# EAGLE board MyEasyPort (EAGLE 6.4)

Size 100 x 80 mm. Coordinates in mm from the lower left corner, seen from the top.
Outline: 0,0 100,0 100,80 0,80 0,0
Copper layers (1*16): Top 0.035mm / dielectric 1.5mm / Bottom 0.035mm
Design rules "default": minimum track width 10mil, minimum drill 24mil, track to track 8mil, track to pad 8mil, pad to pad 8mil, via to via 8mil, smd to smd 8mil, copper to edge 40mil, drill to drill 8mil, minimum pad ring 10mil, minimum via ring 8mil, stop-mask expansion 4mil, vias tented up to drill 0mil, thermal gap 10mil

## Footprints (pad centres in the part's own frame; a part is rotated, then mirrored left to right if it is on the bottom)
2X25 = drill 1.016 octagon: 1 -30.48,-1.27; 2 -30.48,1.27; 3 -27.94,-1.27; 4 -27.94,1.27; 5 -25.4,-1.27; 6 -25.4,1.27; 7 -22.86,-1.27; 8 -22.86,1.27; 9 -20.32,-1.27; 10 -20.32,1.27; 11 -17.78,-1.27; 12 -17.78,1.27; 13 -15.24,-1.27; 14 -15.24,1.27; 15 -12.7,-1.27; 16 -12.7,1.27; 17 -10.16,-1.27; 18 -10.16,1.27; 19 -7.62,-1.27; 20 -7.62,1.27; 21 -5.08,-1.27; 22 -5.08,1.27; 23 -2.54,-1.27; 24 -2.54,1.27; 25 0,-1.27; 26 0,1.27; 27 2.54,-1.27; 28 2.54,1.27; 29 5.08,-1.27; 30 5.08,1.27; 31 7.62,-1.27; 32 7.62,1.27; 33 10.16,-1.27; 34 10.16,1.27; 35 12.7,-1.27; 36 12.7,1.27; 37 15.24,-1.27; 38 15.24,1.27; 39 17.78,-1.27; 40 17.78,1.27; 41 20.32,-1.27; 42 20.32,1.27; 43 22.86,-1.27; 44 22.86,1.27; 45 25.4,-1.27; 46 25.4,1.27; 47 27.94,-1.27; 48 27.94,1.27; 49 30.48,-1.27; 50 30.48,1.27
2X10 = drill 1.016 octagon: 1 -11.43,-1.27; 2 -11.43,1.27; 3 -8.89,-1.27; 4 -8.89,1.27; 5 -6.35,-1.27; 6 -6.35,1.27; 7 -3.81,-1.27; 8 -3.81,1.27; 9 -1.27,-1.27; 10 -1.27,1.27; 11 1.27,-1.27; 12 1.27,1.27; 13 3.81,-1.27; 14 3.81,1.27; 15 6.35,-1.27; 16 6.35,1.27; 17 8.89,-1.27; 18 8.89,1.27; 19 11.43,-1.27; 20 11.43,1.27
SO16 = smd 0.66 x 2.032: 1 -4.445,-3.073; 2 -3.175,-3.073; 3 -1.905,-3.073; 4 -0.635,-3.073; 5 0.635,-3.073; 6 1.905,-3.073; 7 3.175,-3.073; 8 4.445,-3.073; 9 4.445,3.073; 10 3.175,3.073; 11 1.905,3.073; 12 0.635,3.073; 13 -0.635,3.073; 14 -1.905,3.073; 15 -3.175,3.073; 16 -4.445,3.073

## Placement (x,y rotation side)
JP1  [2X25]  63.5,40.64 0 top
JP2  [2X10]  33.02,8.89 180 top
JP3  [2X10]  63.5,69.85 0 top
U$1  SI8442IS1  [SO16]  36.83,29.21 180 top
U$2  SI8442IS1  [SO16]  57.15,29.21 180 top
U$3  SI8442IS1  [SO16]  76.2,29.21 180 top
U$4  SI8442IS1  [SO16]  91.44,29.21 180 top
U$5  SI8442IS1  [SO16]  92.71,49.53 0 top
U$6  SI8442IS1  [SO16]  76.2,49.53 0 top
U$7  SI8442IS1  [SO16]  57.15,49.53 0 top
U$8  SI8442IS1  [SO16]  36.83,49.53 0 top

## Library data of the parts
JP1-JP3 = pinhead
U$1-U$8 = silicon-labs

## Nets
3.3V+: JP3.20 U$1.10 U$1.16 U$2.10 U$2.16 U$3.10 U$3.16 U$4.10 U$4.16 U$5.10 U$5.16 U$6.10 U$6.16 U$7.10 U$7.16 U$8.10 U$8.16
5V+: JP1.49 U$1.1 U$1.7 U$2.1 U$2.7 U$3.1 U$4.1 U$4.7 U$5.1 U$5.7 U$6.1 U$6.7 U$7.1 U$7.7 U$8.1 U$8.7
C0-0: JP1.1 U$1.6
C0-1: JP1.6 U$8.5
C0-2: JP1.3 U$1.5
C0-3: JP1.8 U$8.6
C0-4: JP1.17 U$2.6
C0-5: JP1.22 U$7.5
C0-6: JP1.19 U$2.5
C0-7: JP1.24 U$7.6
C1-0: JP1.2 U$8.3
C1-1: JP1.5 U$1.4
C1-2: JP1.4 U$8.4
C1-3: JP1.7 U$1.3
C1-4: JP1.18 U$7.3
C1-5: JP1.21 U$2.4
C1-6: JP1.20 U$7.4
C1-7: JP1.23 U$2.3
C2-0: JP1.33 U$3.6
C2-1: JP1.38 U$6.5
C2-2: JP1.35 U$3.5
C2-3: JP1.40 U$6.6
C2-4: JP1.41 U$4.6
C2-5: JP1.46 U$5.5
C2-6: JP1.43 U$4.5
C2-7: JP1.48 U$5.6
C3-0: JP1.34 U$6.3
C3-1: JP1.37 U$3.4
C3-2: JP1.36 U$6.4
C3-3: JP1.39 U$3.3
C3-4: JP1.42 U$5.3
C3-5: JP1.45 U$4.4
C3-6: JP1.44 U$5.4
C3-7: JP1.47 U$4.3
GND1: JP1.50 U$1.8 U$2.8 U$3.8 U$4.8 U$5.8 U$6.8 U$7.8 U$8.8
GND1A: U$8.2
GND2: JP3.17 U$1.9 U$2.9 U$3.9 U$4.9 U$5.9 U$6.9 U$7.9 U$8.9
PA2: JP2.1 U$3.12
PA3: JP2.3 U$3.11
PA4: JP2.5 U$2.12
PA5: JP3.6 U$6.14
PA6: JP3.4 U$5.13
PA7: JP3.2 U$5.14
PB0: JP3.16 U$8.13
PB1: JP3.14 U$8.14
PB2: JP2.17 U$1.11
PB3: JP2.16 U$2.13
PB4: JP3.8 U$6.13
PB6: JP2.7 U$2.11
PB7: JP2.9 U$1.12
PC4: JP2.14 U$2.14
PC5: JP2.12 U$3.13
PC6: JP2.10 U$3.14
PC7: JP2.8 U$4.14
PD0: JP3.15 U$8.11
PD1: JP3.13 U$8.12
PD2: JP3.11 U$7.11
PD3: JP3.9 U$7.12
PD6: JP2.6 U$4.13
PD7: JP2.4 U$4.12
PE1: JP3.7 U$6.11
PE2: JP3.5 U$6.12
PE3: JP3.3 U$5.11
PE4: JP3.12 U$7.13
PE5: JP3.10 U$7.14
PF1: JP3.1 U$5.12
PF2: JP2.20 U$1.13
PF3: JP2.18 U$1.14
PF4: JP2.2 U$4.11

## Tracks (layer width: path | path; a pad name or v marks a point on that pad's centre or on a via)
3.3V+  (16 unrouted)
5V+  (15 unrouted)
C0-0  (1 unrouted)
C0-1  (1 unrouted)
C0-2  (1 unrouted)
C0-3  (1 unrouted)
C0-4  (1 unrouted)
C0-5  (1 unrouted)
C0-6  (1 unrouted)
C0-7  (1 unrouted)
C1-0  (1 unrouted)
C1-1  (1 unrouted)
C1-2  (1 unrouted)
C1-3  (1 unrouted)
C1-4  (1 unrouted)
C1-5  (1 unrouted)
C1-6  (1 unrouted)
C1-7  (1 unrouted)
C2-0  (1 unrouted)
C2-1  (1 unrouted)
C2-2  (1 unrouted)
C2-3  (1 unrouted)
C2-4  (1 unrouted)
C2-5  (1 unrouted)
C2-6  (1 unrouted)
C2-7  (1 unrouted)
C3-0  (1 unrouted)
C3-1  (1 unrouted)
C3-2  (1 unrouted)
C3-3  (1 unrouted)
C3-4  (1 unrouted)
C3-5  (1 unrouted)
C3-6  (1 unrouted)
C3-7  (1 unrouted)
GND1  (8 unrouted)
GND2  (8 unrouted)
PA2  (1 unrouted)
PA3  (1 unrouted)
PA4  (1 unrouted)
PA5  (1 unrouted)
PA6  (1 unrouted)
PA7  (1 unrouted)
PB0  (1 unrouted)
PB1  (1 unrouted)
PB2  (1 unrouted)
PB3  (1 unrouted)
PB4  (1 unrouted)
PB6  (1 unrouted)
PB7  (1 unrouted)
PC4  (1 unrouted)
PC5  (1 unrouted)
PC6  (1 unrouted)
PC7  (1 unrouted)
PD0  (1 unrouted)
PD1  (1 unrouted)
PD2  (1 unrouted)
PD3  (1 unrouted)
PD6  (1 unrouted)
PD7  (1 unrouted)
PE1  (1 unrouted)
PE2  (1 unrouted)
PE3  (1 unrouted)
PE4  (1 unrouted)
PE5  (1 unrouted)
PF1  (1 unrouted)
PF2  (1 unrouted)
PF3  (1 unrouted)
PF4  (1 unrouted)